# EAGLE board lcd-y-botones (EAGLE 9.0.0)
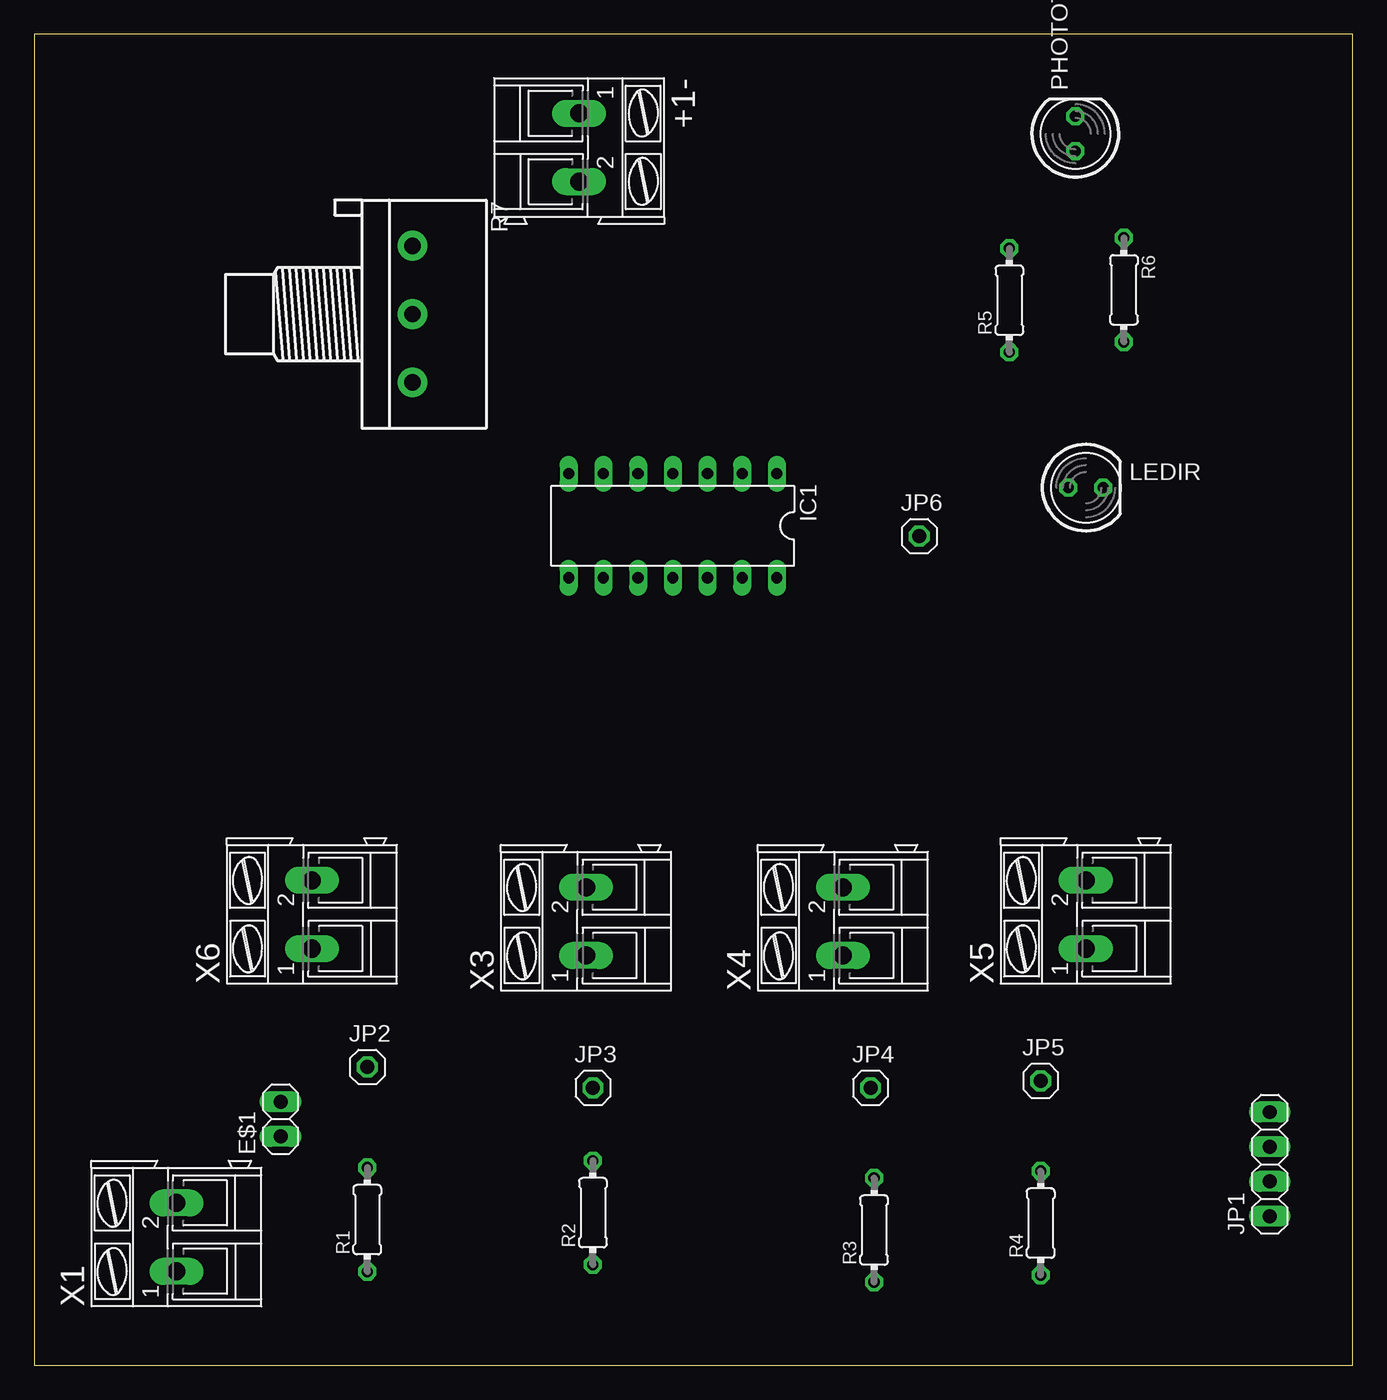
[diagram p0: board, top side]
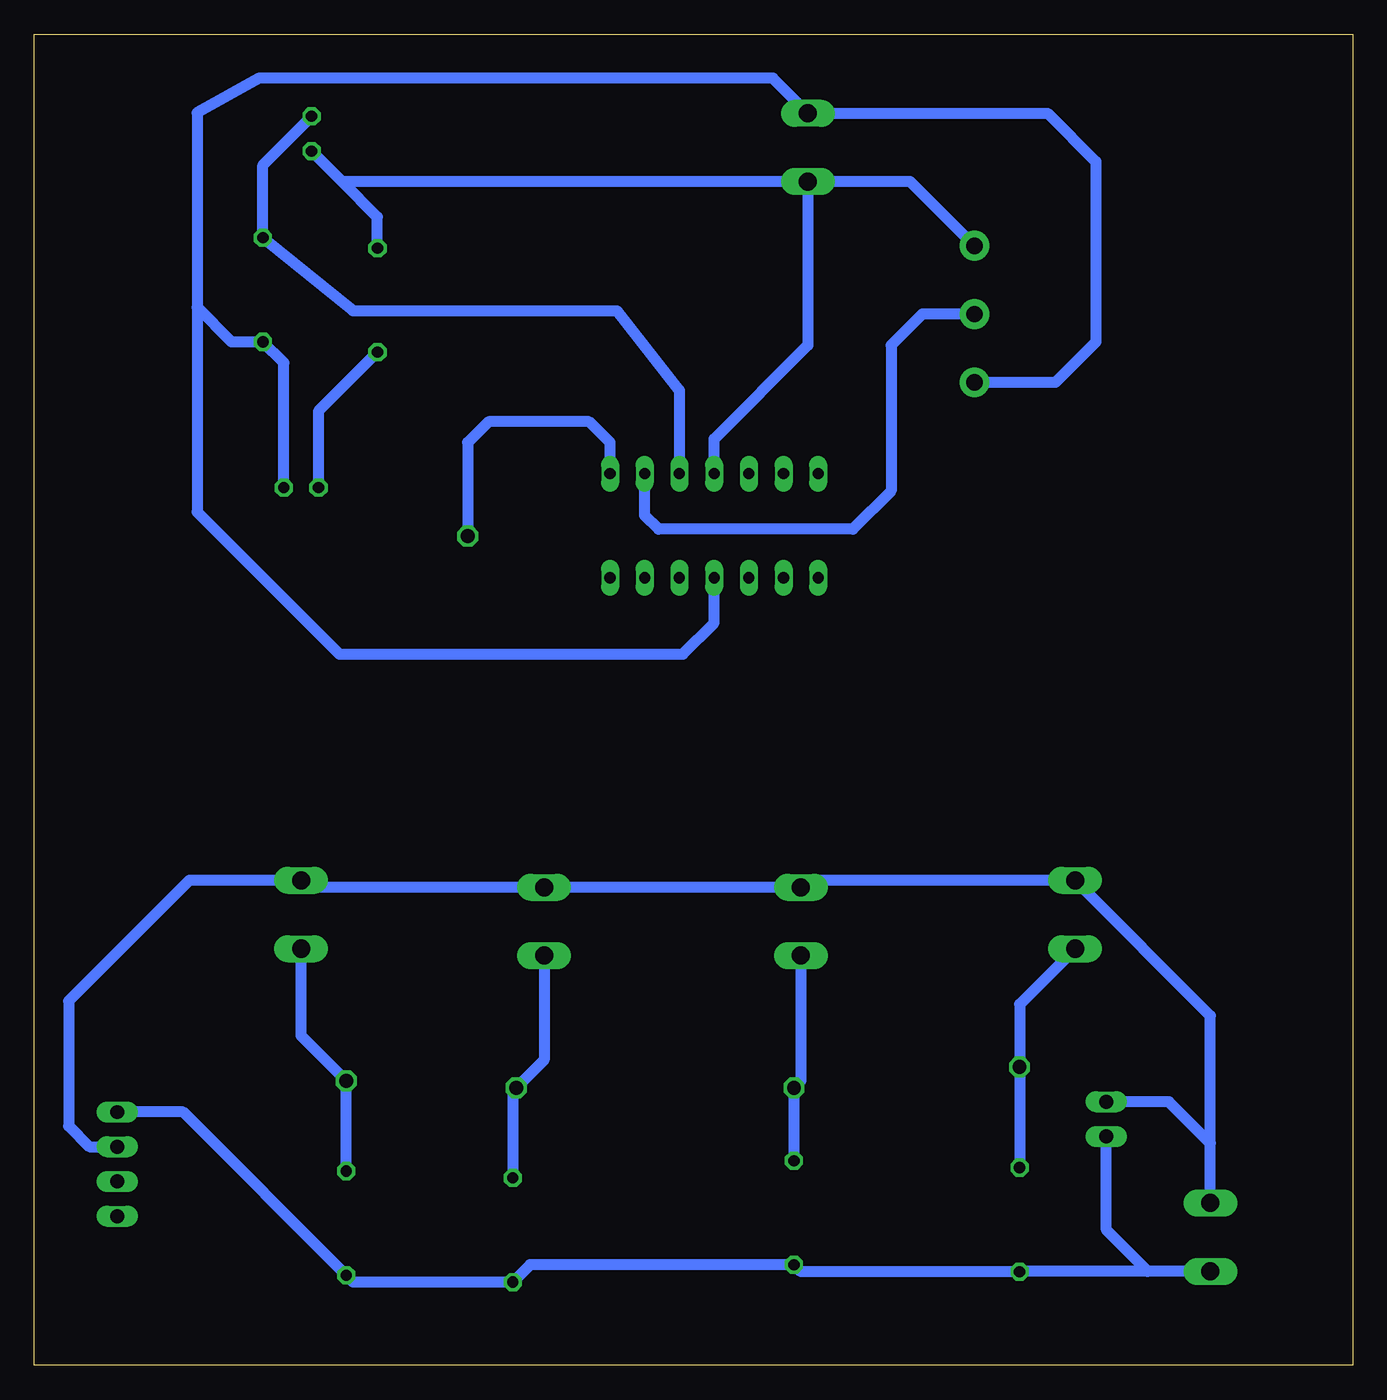
[diagram p1: board, bottom side, seen from below]

Size 96.5 x 97.46 mm. Coordinates in mm from the lower left corner, seen from the top.
Outline: 0,0 96.5,0 96.5,97.46 0,97.46 0,0
Copper layers (1*16): Top 0.035mm / dielectric 1.5mm / Bottom 0.035mm
Design rules "default": minimum track width 6mil, minimum drill 0.35mm, track to track 6mil, track to pad 6mil, pad to pad 6mil, via to via 6mil, smd to smd 6mil, copper to edge 40mil, drill to drill 6mil, minimum pad ring 10mil, minimum via ring 8mil, stop-mask expansion 4mil, vias tented up to drill 0mil, thermal gap 10mil

## Footprints (pad centres in the part's own frame; a part is rotated, then mirrored left to right if it is on the bottom)
AK300/2 = drill 1.321 long: 1 -2.515,0; 2 2.489,0
1X02 = drill 1.016 long: 1 -1.27,0; 2 1.27,0
DIL14 = drill 0.813 long: 1 -7.62,-3.81; 2 -5.08,-3.81; 3 -2.54,-3.81; 4 0,-3.81; 5 2.54,-3.81; 6 5.08,-3.81; 7 7.62,-3.81; 8 7.62,3.81; 9 5.08,3.81; 10 2.54,3.81; 11 0,3.81; 12 -2.54,3.81; 13 -5.08,3.81; 14 -7.62,3.81
1X04 = drill 1.016 long: 1 -3.81,0; 2 -1.27,0; 3 1.27,0; 4 3.81,0
1X01 = drill 1.016 octagon: 1 0,0
LED5MM = drill 0.813 octagon: A -1.27,0; K 1.27,0
0204/7 = drill 0.813 octagon: 1 -3.81,0; 2 3.81,0
3RP/1610N = drill 1.2 pad 2.184: 1 -5,0; 2 0,0; 3 5,0

## Placement (x,y rotation side)
+1-  [AK300/2]  39.88,89.15 270 top
E$1  [1X02]  18.03,18.03 90 top
IC1  LM324N  [DIL14]  46.74,61.47 180 top
JP1  [1X04]  90.42,14.73 90 top
JP2  [1X01]  24.38,21.84 0 top
JP3  [1X01]  40.89,20.32 0 top
JP4  [1X01]  61.21,20.32 0 top
JP5  [1X01]  73.66,20.83 0 top
JP6  [1X01]  64.77,60.71 0 top
LEDIR  [LED5MM]  76.96,64.26 0 top
PHOTOTRANSIOTR  [LED5MM]  76.2,90.17 90 top
R1  [0204/7]  24.38,10.67 90 top
R2  [0204/7]  40.89,11.18 90 top
R3  [0204/7]  61.47,9.91 90 top
R4  [0204/7]  73.66,10.41 90 top
R5  100  [0204/7]  71.37,77.98 90 top
R6  4.7k  [0204/7]  79.76,78.74 270 top
R7  [3RP/1610N]  27.69,76.96 270 top
X1  [AK300/2]  10.41,9.4 90 top
X3  [AK300/2]  40.39,32.51 90 top
X4  [AK300/2]  59.18,32.51 90 top
X5  [AK300/2]  76.96,33.02 90 top
X6  [AK300/2]  20.32,33.02 90 top

## Library data of the parts
+1- X1 X3-X6 = con-ptr500; OC_FARNELL: unknown; OC_NEWARK: unknown
E$1 JP1-JP6 = pinhead
IC1 = linear
LEDIR PHOTOTRANSIOTR = led
R1-R6 = rcl; SPICEPREFIX: R
R7 = pot

## Nets
N$1: JP1.3 X1.2 X3.2 X4.2 X5.2 X6.2
N$2: JP1.4 R1.1 R2.1 R3.1 R4.1 X1.1
N$3: JP5.1 R4.2 X5.1
N$4: JP4.1 R3.2 X4.1
N$5: JP3.1 R2.2 X3.1
N$6: JP2.1 R1.2 X6.1
N$7: +1-.2 PHOTOTRANSIOTR.A R5.2 R7.1
N$8: LEDIR.A R5.1
N$9: +1-.1 LEDIR.K R6.2 R7.3
N$10: IC1.2 R7.2
N$11: IC1.1 JP6.1
N$12: IC1.3 PHOTOTRANSIOTR.K R6.1
V+: IC1.4
V-: IC1.11

## Tracks (layer width: path | path; a pad name or v marks a point on that pad's centre or on a via)
N$1
  Bottom 0.813: JP1.3 92.46,16 93.98,17.53 93.98,26.67 85.14,35.51 X5.2 76.45,35 X4.2 X3.2 39.88,35.51 X6.2 10.41,25.6 X1.2 10.41,16.26 13.46,19.3 18.8,19.3
N$2
  Bottom 0.813: JP1.4 85.6,18.54 R4.1 73.15,6.1 R3.1 60.2,7.37 R2.1 40.39,6.86 R1.1 24.36,6.88 X1.1 15.01,6.88 18.03,9.91 18.03,17.02
N$3
  Bottom 0.813: X5.1 76.96,24.13 JP5.1 R4.2
N$4
  Bottom 0.813: X4.1 59.18,22.35 JP4.1 61.47,20.07 R3.2
N$5
  Bottom 0.813: R2.2 JP3.1 40.39,20.83 X3.1
N$6
  Bottom 0.813: X6.1 24.38,26.44 JP2.1 R1.2
N$7
  Bottom 0.813: 75.95,88.65 PHOTOTRANSIOTR.A 73.97,86.67 | R7.1 32.39,86.67 +1-.2 | R5.2 71.37,84.07 73.97,86.67 | +1-.2 73.97,86.67 | +1-.2 39.88,74.68
N$8
  Bottom 0.813: R5.1 75.69,69.85 LEDIR.A
N$9
  Bottom 0.813: R7.3 21.76,71.96 18.8,74.93 18.8,88.14 22.33,91.67 +1-.1 42.44,94.23 80.01,94.23 84.58,91.69 84.58,77.47 | LEDIR.K 78.23,73.41 R6.2 82.04,74.93 84.58,77.47 | 46.74,57.66 46.74,54.36 49.02,52.07 74.17,52.07 84.58,62.48 84.58,77.47
N$10
  Bottom 0.813: R7.2 31.5,76.96 33.78,74.68 33.78,64.01 36.58,61.21 50.8,61.21 51.82,62.23 IC1.2
N$11
  Bottom 0.813: IC1.1 54.36,67.56 55.88,69.09 63.25,69.09 64.77,67.56 JP6.1
N$12
  Bottom 0.813: PHOTOTRANSIOTR.K 79.76,87.88 R6.1 73.15,77.22 53.85,77.22 49.28,71.37 IC1.3
V+
  Bottom 0.813: IC1.4 46.74,67.82 39.88,74.68